# EAGLE board d-cam (EAGLE 9.6.2)

Size 120 x 90 mm. Coordinates in mm from the lower left corner, seen from the top.
Outline: 0,0 120,0 120,90 0,90 0,0
Copper layers used: 
Net classes: 0 default: width 0.25 mm, drill 0.6 mm

## Placement (x,y rotation side)
LCD  LCD1602  [LCD1602]  0,0 0 top
RELAY1  5V_RELAY  [RELAY]  0,0 0 top
RFID  RC522  [RC522]  0,0 0 top
RPi  RASPBERRY_PI  [HEADER40]  0,0 0 top

## Library data of the parts
LCD RELAY1 RFID RPi = demo

## Text on the board
layer 21: Attendance System PCB